# Altium PCB DIOT_PSU_Mezzanine.PcbDoc
Units mm, origin at the board's own origin, x right, y up, seen from the top; angles counter-clockwise.
Board outline 52.4 x 79.6 mm, 2 copper layers (Top Layer, Bottom Layer), stack 1.69 mm thick; 23 components, 16 nets, 70 pads, 10 vias.
Unrouted connection lines stored in the file: 1.
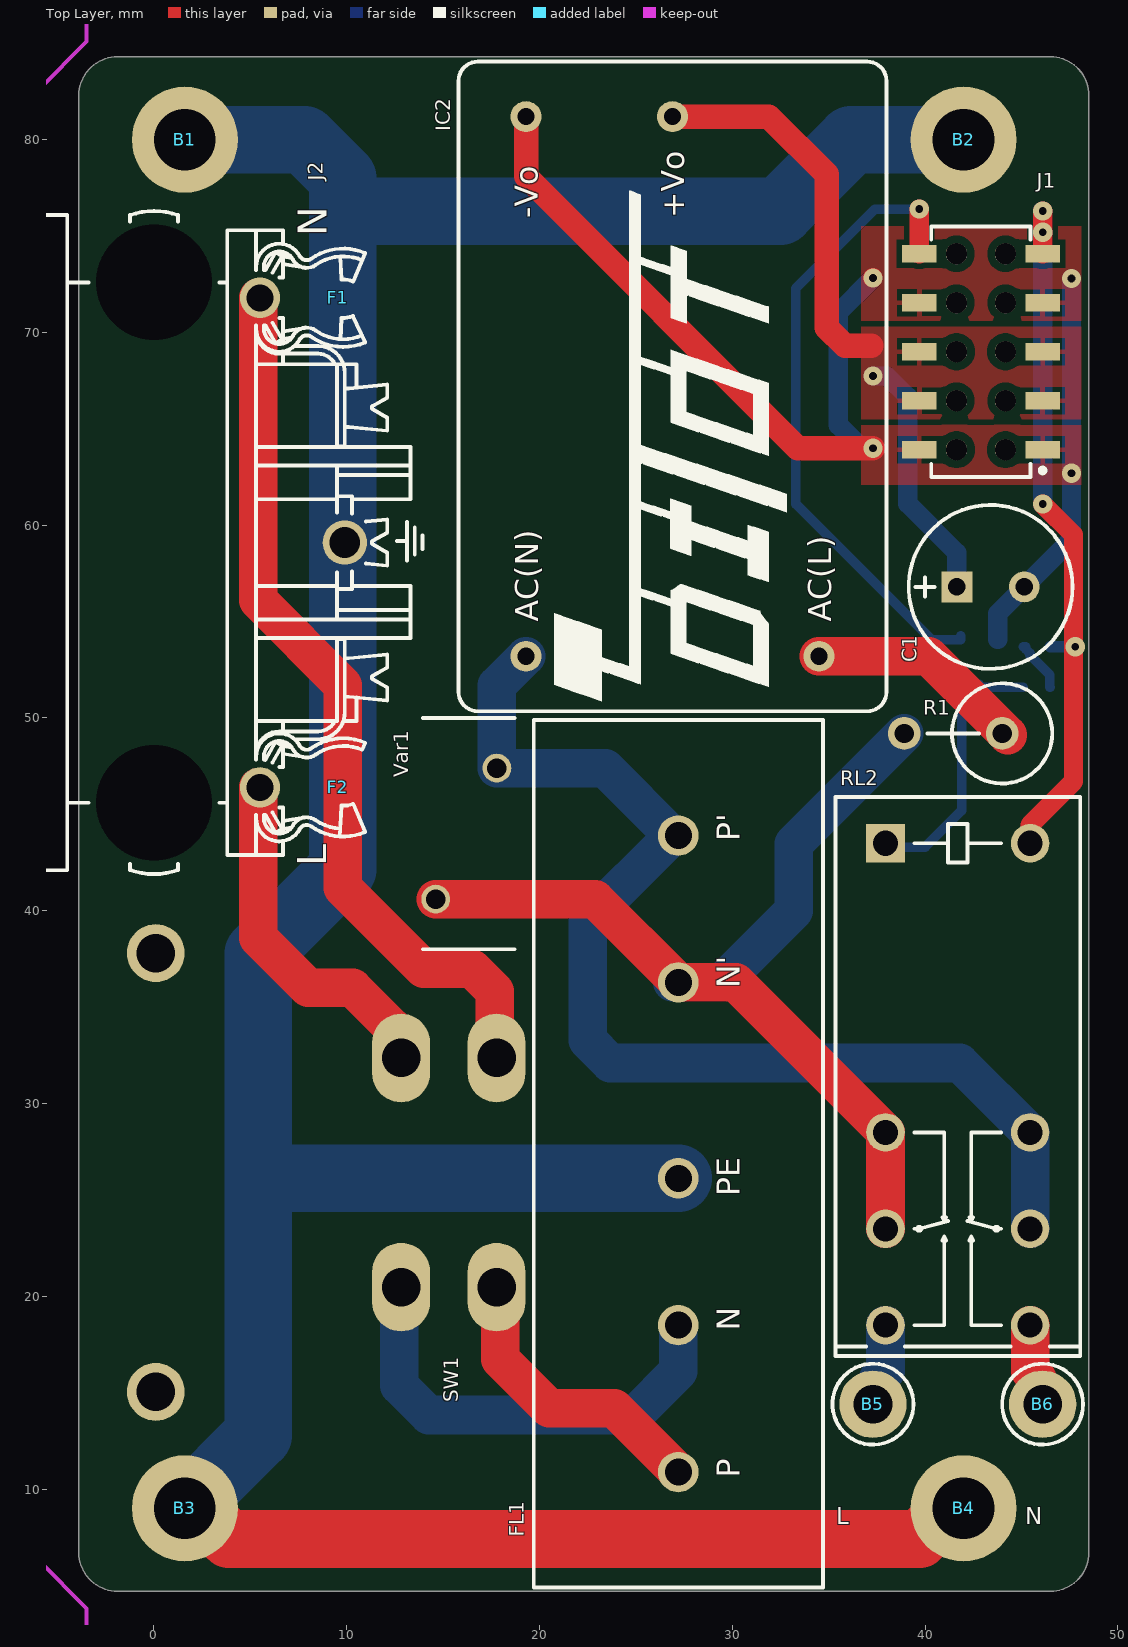
[diagram p0: Top Layer view]
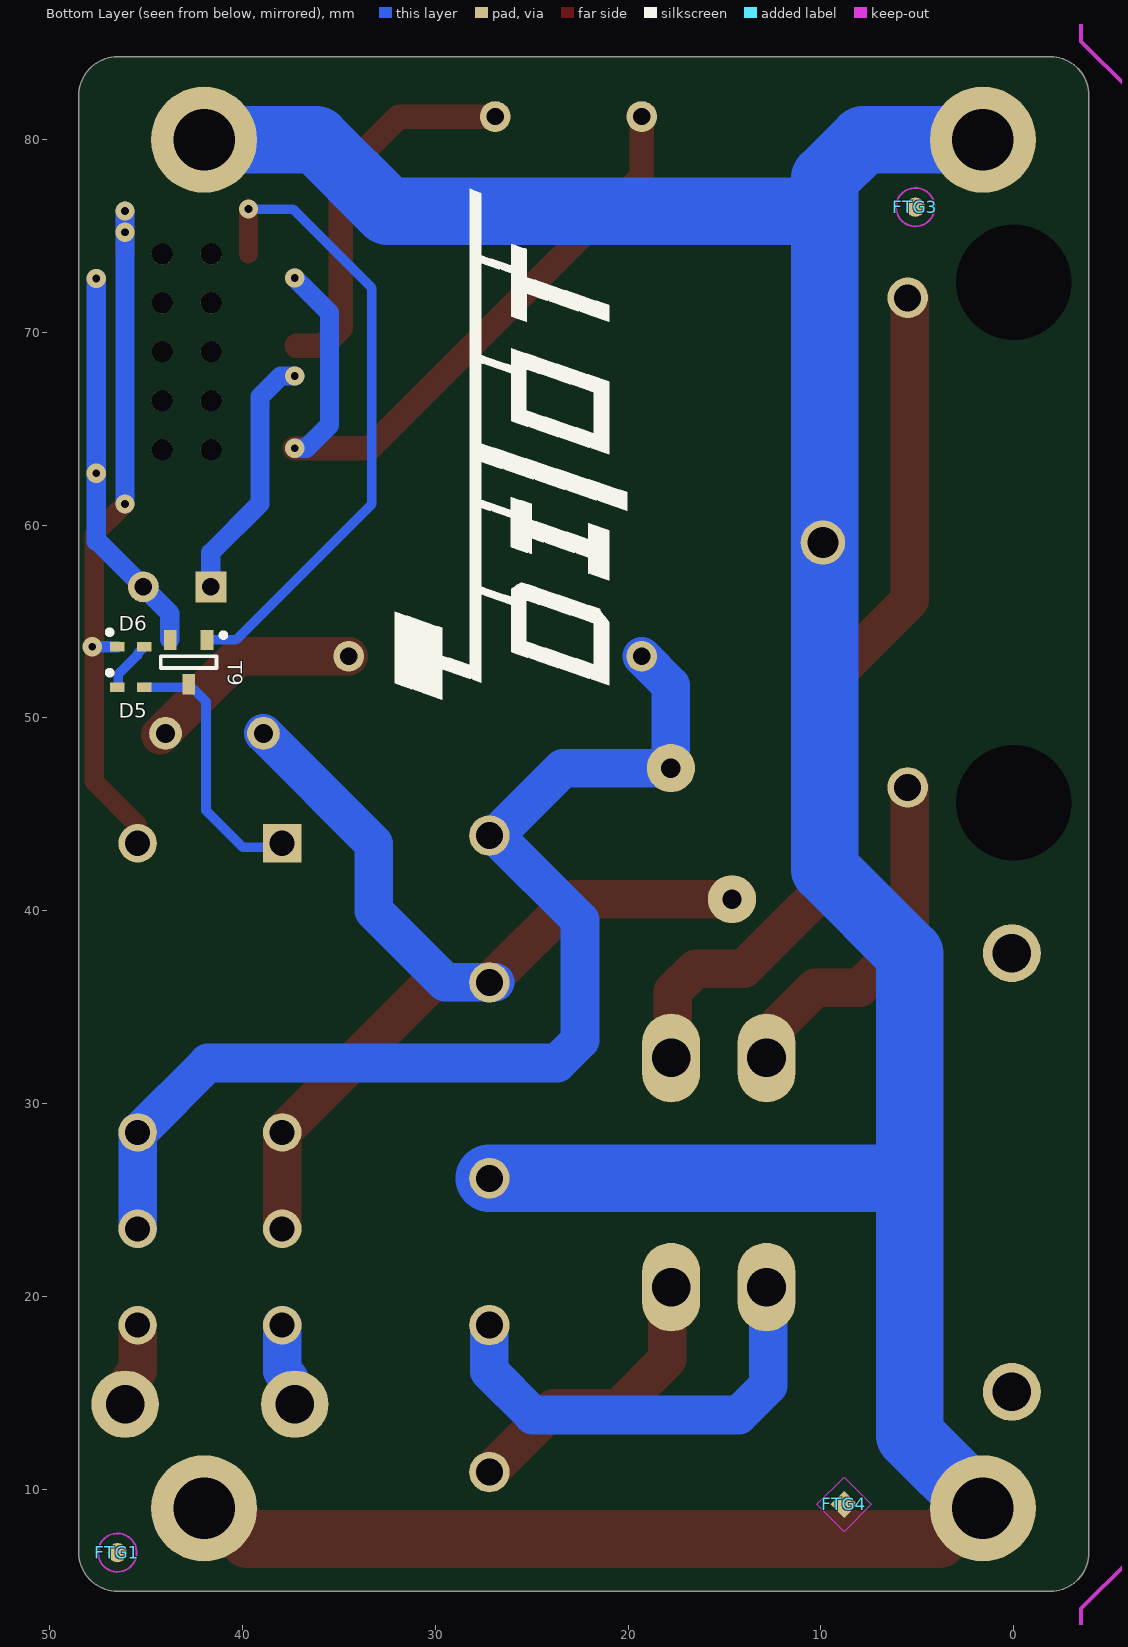
[diagram p1: Bottom Layer view, seen from below]
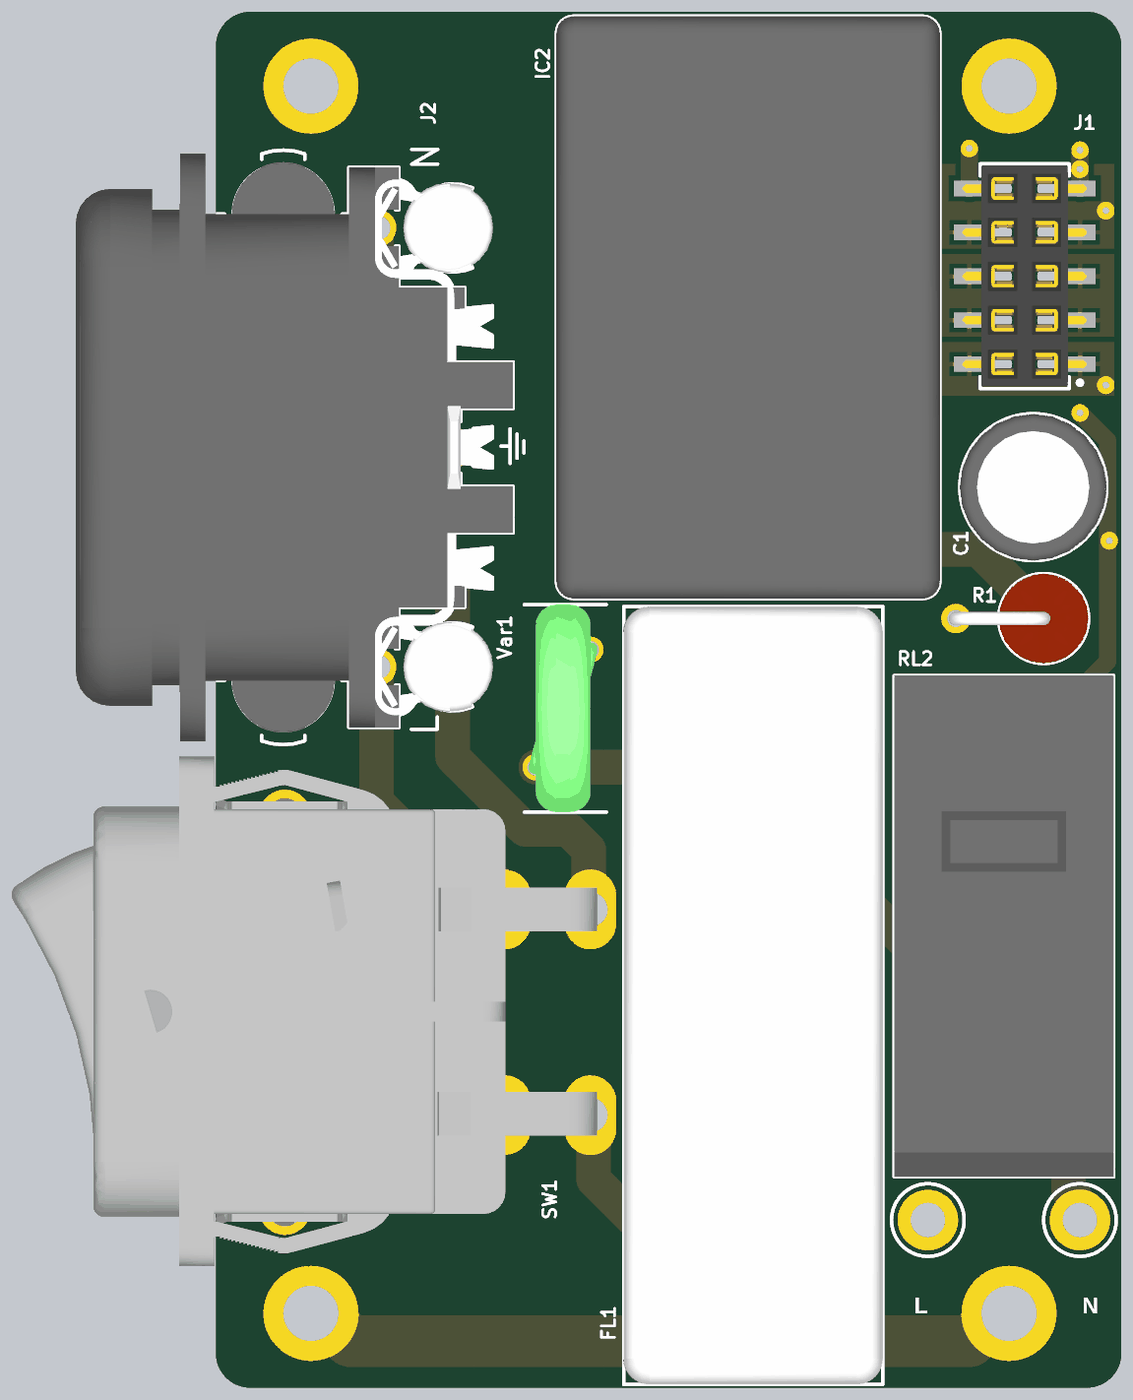
[diagram p2: 3D render of the assembled board from above, using the file's embedded part models]
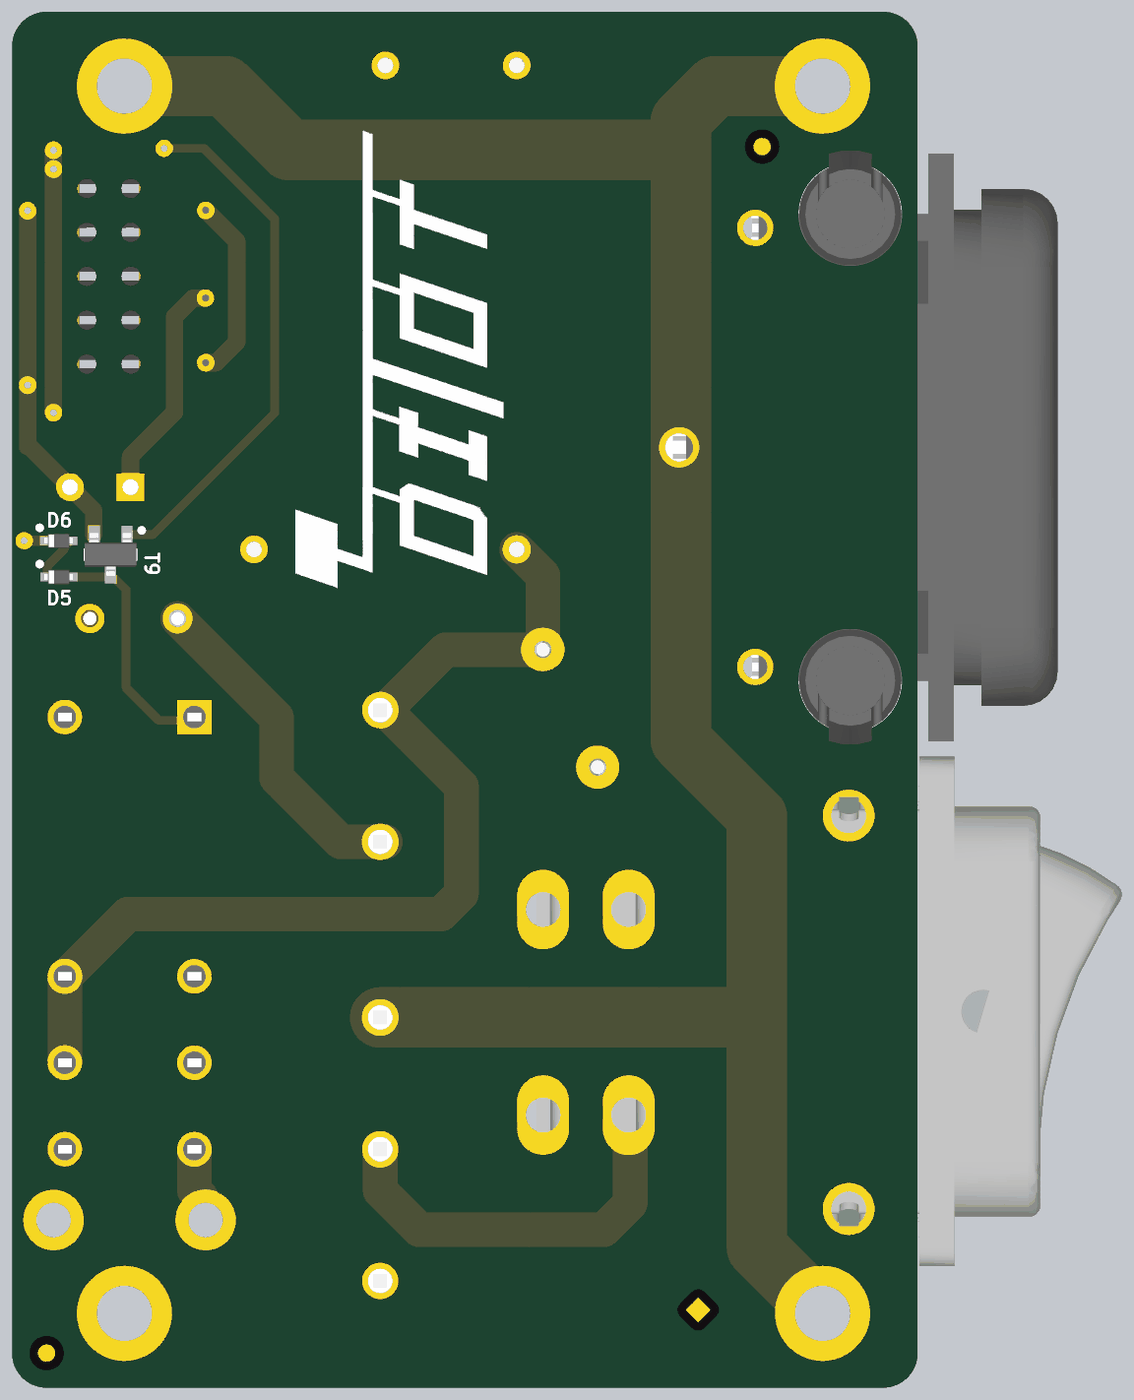
[diagram p3: 3D render of the assembled board from below, using the file's embedded part models]

## Layer stack, top to bottom
Top Solder: solder mask 0.02, Solder Resist, Dk 3.5
Top Layer: signal copper 0.07
Dielectric 2: core 1.55, FR-4, Dk 4.3
Bottom Layer: signal copper 0.07
Bottom Solder: solder mask 0.02, Solder Resist, Dk 3.5

## Board outline
-3.9,6.7 -3.9,82.3 cw(c-1.9,82.3) -1.9,84.3 46.5,84.3 cw(c46.5,82.3) 48.5,82.3 48.495,82.3 48.495,6.7 48.5,6.7 cw(c46.5,6.7) 46.5,4.7 -1.9,4.7 cw(c-1.9,6.7)

## Design rules (kind name [scope] priority, off if disabled: settings)
AcuteAngle [All] p1: minimum=6.00000000000000E+0001 checktracksonly=FALSE
BoardOutlineClearance [All] p1: gap=0.203 ignorepadtopadclearanceinfootprint=FALSE except(0: Arc-SplitContinuation Track-SplitContinuation SMDPad-SplitContinuation THPad-SplitContinuation Via-SplitContinuation Fill-SplitContinuation Poly-SplitContinuation Region-SplitContinuation Text-SplitContinuation; 0.25: Track-OutlineEdge SMDPad-OutlineEdge THPad-OutlineEdge Via-OutlineEdge Fill-OutlineEdge Poly-OutlineEdge Region-OutlineEdge)
Clearance Clearance_NPTH [not IsSMTPin and not PadIsPlated] p1: gap=0.4 ignorepadtopadclearanceinfootprint=FALSE
Clearance Clearance_Mires [OnLayer('Keep-Out Layer') vs HasFootprint('FIDUCIAL_TOP_S200-400') or HasFootprint('FIDUCIAL_TOP_C100-200') or HasFootprint('FIDUCIAL_TOP_S100-200') or  HasFootprint('FIDUCIAL_TOP_C40-120')] p2: gap=0 ignorepadtopadclearanceinfootprint=FALSE except(4.9: Arc-SMDPad Track-SMDPad)
Clearance Clearance_outer [OnOutside] p3: gap=0.305 ignorepadtopadclearanceinfootprint=FALSE
Clearance Clearance_inner [OnMid] p4: gap=0.254 ignorepadtopadclearanceinfootprint=FALSE
ComponentClearance ComponentClearance_pressfit [HasCompParameterValue('PressFit','Yes') vs InComponent('No Component')] p1: gap=1 collisioncheckmode=3 verticalgap=0.254 showdistances=FALSE
ComponentClearance ComponentClearance_NM [InComponentClass('NotMounted')] p2: gap=0 collisioncheckmode=3 verticalgap=0 showdistances=FALSE
ComponentClearance Clearance_screws [InComponent('SCREW1') or InComponent('SCREW2') or InComponent('SCREW3') or InComponent('SCREW4') or InComponent('B1') or InComponent('B2') or InComponent('B3') or InComponent('B4') vs InComponent('B1') or InComponent('B2') or InComponent('B3') or InComponent('B4') or InComponent('WASHER1') or InComponent('WASHER2') or InComponent('WASHER3') or InComponent('WASHER4')] p3: gap=-5 collisioncheckmode=3 verticalgap=-5 showdistances=FALSE checkcomponentboundary=TRUE
ComponentClearance ComponentClearance_Top [InComponent('J2') vs InComponent('F1') or InComponent('F2')] p4: gap=-5 collisioncheckmode=3 verticalgap=-5 showdistances=FALSE
ComponentClearance [All] p5: gap=0.254 collisioncheckmode=3 verticalgap=0.254 showdistances=FALSE
FabricationTestPointUsage TestPointUsage [All] p1: valid=0 allowmultiple=FALSE
FabricationTestpoint Testpoint [All] p1: side=3 testpointundercomponent=TRUE minsize=1.016 maxsize=2.54 preferedsize=1.524 minholesize=0 maxholesize=1.016 preferedholesize=0.813 testpointgrid=0.025 allowsidetop=TRUE allowsidebottom=TRUE usegrid=TRUE gridtolerance=0
Height Height_Bot [OnBottom] p1: minheight=0 maxheight=2 prefheight=1
Height Height_Top [OnTop] p2: minheight=0 maxheight=35 prefheight=10
HoleSize [All] p1: absolutevalues=TRUE maxlimit=6 minlimit=0.4 maxpercent=80.000 minpercent=20.000
HoleToHoleClearance [All] p1: gap=0.2 allowstackedmicrovias=TRUE
MinimumAnnularRing MinimumAnnularRing_Via [IsVia] p1: minimumring=0.25
MinimumSolderMaskSliver [IsThruPin vs IsThruPin] p1: minsoldermaskwidth=0
PermittedLayers [All] p1: toplayerpermitted=TRUE bottomlayerpermitted=TRUE
PlaneConnect PlaneConnect_Vias [(IsVia or InPadClass('Direct')   )] p1: planeconnectstyle=Direct reliefexpansion=0.508 reliefentries=4 reliefconductorwidth=0.254 reliefairgap=0.254
PlaneConnect "PlaneConnect_0 > 0.5" [AsMM(HoleDiameter)<0.5] p2: planeconnectstyle=Relief reliefexpansion=0.3 reliefentries=4 reliefconductorwidth=0.2 reliefairgap=0.2
PlaneConnect "PlaneConnect_0.5 > 1" [(AsMM(HoleDiameter)>=0.5) and (AsMM(HoleDiameter)<1)] p3: planeconnectstyle=Relief reliefexpansion=0.3 reliefentries=4 reliefconductorwidth=0.25 reliefairgap=0.2
PlaneConnect "PlaneConnect_1 > 1.5" [(AsMM(HoleDiameter)>=1) and (AsMM(HoleDiameter)<1.5)] p4: planeconnectstyle=Relief reliefexpansion=0.3 reliefentries=4 reliefconductorwidth=0.3 reliefairgap=0.2
PlaneConnect "PlaneConnect_1.5 > 2" [(AsMM(HoleDiameter)>=1.5) and (AsMM(HoleDiameter)<4)] p5: planeconnectstyle=Direct reliefexpansion=0.3 reliefentries=4 reliefconductorwidth=0.4 reliefairgap=0.2
PlaneConnect [All] p6: planeconnectstyle=Relief reliefexpansion=0.3 reliefentries=4 reliefconductorwidth=0.5 reliefairgap=0.2
PolygonConnect PolygonConnect_PE [InNet('PE') vs InComponent('J5')] p1: connectstyle=Direct reliefconductorwidth=0.254 reliefentries=4 polygonreliefangle="90 Angle" airgapwidth=0.254
PolygonConnect [All] p2: thpad.connectstyle=Relief thpad.reliefconductorwidth=0.85 thpad.reliefentries=4 thpad.polygonreliefangle="45 Angle" thpad.airgapwidth=0.254 smdpad.connectstyle=Relief smdpad.reliefconductorwidth=0.254 smdpad.reliefentries=4 smdpad.polygonreliefangle="90 Angle" smdpad.airgapwidth=0.254 via.connectstyle=Direct via.reliefconductorwidth=0.254 via.reliefentries=4 via.polygonreliefangle="90 Angle" via.airgapwidth=0.254
RoutingLayers RoutingLayers_MGT [InNetClass('FMC_MGT') or InNetClass('SLOT1_MGT') or InNetClass('SLOT2_MGT')  or InNetClass('SLOT3_MGT')  or InNetClass('SLOT4_MGT') or InNetClass('SLOT5_MGT')  or InNetClass('SLOT6_MGT')    or InNetClass('SLOT7_MGT')   or InNetClass('SLOT8_MGT')] p1: top layer_v5=TRUE bottom layer_v5=TRUE
RoutingVias [All] p1: holewidth=0.5 width=1 viastyle="Through Hole" minholewidth=0.4 minwidth=1 maxholewidth=1 maxwidth=2
SilkToSilkClearance [All] p1: silktosilkclearance=0.01
SilkToSolderMaskClearance [IsPad and not InPadClass ('Overlay_exceptions')] p1: minsilkscreentomaskgap=0.075 clearancetoexposedcopper=TRUE
SolderMaskExpansion [All] p1: expansion=0.015 istentingtop=FALSE
SupplyNets "Schematic Supply Nets_1" [InNet('P5V0')] p1: voltage=0.000
SupplyNets "Schematic Supply Nets" [InNet('P5V0_REL')] p2: voltage=0.000
SupplyNets "Schematic Supply Nets_5" [InNet('PE')] p3: voltage=0.000
SupplyNets "Schematic Supply Nets_2" [InNet('GND')] p4: voltage=0.000
UnRoutedNet [Not InNet('CHASSIS')] p1:
ViasUnderSMD [All] p1: allowed=FALSE
Width [All] p1: maxlimit=5 minlimit=0.2 preferedwidth=0.5
18 further rules are at their usual default settings.

## Components (designator, comment, footprint, x,y, rotation, side; value= is the part's Value field where it differs from the comment)
B1 "Plated Hole" MTG320_550 1.6,80 r0 top
B2 "Plated Hole" MTG320_550 42,80 r0 top
B3 "Plated Hole" MTG320_550 1.6,9 r0 top
B4 "Plated Hole" MTG320_550 42,9 r0 top
B5 "Plated Hole" c350h200 37.3,14.4 r0 top
B6 "Plated Hole" c350h200 46.1,14.4 r0 top
C1 "100uF" CAPPR350-850X600 43.4,56.8 r0 top
D5 "PESD3V3S1UB" SODFL1608X65N 45.8,51.6 r180 bottom
D6 "PESD3V3S1UB" SODFL1608X65N 45.8,53.7 r180 bottom
F1 "0001.1012" 0001.1012 9.545,71.8 r0 top
F2 "0001.1012" 0001.1012 9.545,46.4 r0 top
FL1 "1A/250VAC" "FIL_SCHAFFNER_FN 406" 27.2,27.39 r90 top
FTG1 "Use only in PCB" FIDUCIAL_TOP_C100-200 46.5,6.7 r180 bottom
FTG3 "Use only in PCB" FIDUCIAL_TOP_C100-200 5.1,76.5 r0 bottom
FTG4 "Use only in PCB" FIDUCIAL_TOP_S100-200 8.8,9.2 r0 bottom
IC2 "IRM-02-5" PWS_MEANWELL_IRM-02 26.9,67.2 r90 top
J1 "610010243021" 610010243021 42.9,69 r90 top
J2 "IEC" SCHURTER_GSF1.2202.31 0,59.1 r90 top
R1 "10" RESADV508-1670X520 44,49.2 r180 top
RL2 "REL_OMRON_G2RL-24" REL_OMRON_G2RL-24 41.7,31.4 r270 top value=5VDC
SW1 "DF62J12S2AHQA" DF62J12S2AHQA 0.093,15.04 r0 top
T9 "BSS138LT1G" SOT95P240X110-3N 42.8,52.9 r270 bottom
Var1 "V10N361" "VARISTOR THT" 16.2,44 r270 top

## Footprints (in the part's own frame and the unit in brackets; to place one, negate y for a bottom-side part, rotate by r counter-clockwise, add the part's x,y. Pads: shape width x height; smd on the part's side, far side on the other; paste and mask are expansions set on the pad)
0001.1012 [mm]
  body extent -2.6,-2.59 2.6,2.59, height 22
610010243021 [mm] "Socket Header, Pitch 2.54 mm, SMT, Vertical, dual row, 10p"
  rect 0.9x1.8 smd: 1(-5.08,-3.2) 2(-5.08,3.2) 3(-2.54,-3.2) 4(-2.54,3.2) 5(0,-3.2) 6(0,3.2) 7(2.54,-3.2) 8(2.54,3.2) 9(5.08,-3.2) 10(5.08,3.2)
  round 1.1 hole 1.1 unplated: MH1(-5.08,-1.27) MH2(-5.08,1.27) MH3(-2.54,-1.27) MH4(-2.54,1.27) MH5(0,-1.27) MH6(0,1.27) MH7(2.54,-1.27) MH8(2.54,1.27) MH9(5.08,-1.27) MH10(5.08,1.27)
  silkscreen extent -6.5,-3.33 6.5,2.58, body extent -6.35,-3.6 6.35,3.6, height 3.7
c350h200 [mm] "Plated Through Hole: Hole Dia.=2mm Pad Dia.=3.5mm"
  round 3.5 hole 2: 1(0,0)
  silkscreen extent -2.1,-2.1 2.1,2.1
CAPPR350-850X600 [mm] "Capacitor, Radial, Pin spacing 3.5mm - Body Diameter 8.5mm X Body Height 6.0mm"
  rect 1.6x1.6 hole 0.9: 1(-1.75,0)
  round 1.6 hole 0.9: 2(1.75,0)
  silkscreen extent -4.25,-4.25 4.25,4.25, body extent -4.26,-4.26 4.24,4.24, height 6
DF62J12S2AHQA [mm]
  oval 3x4.6 hole 2: 1(12.73,17.325) 1A(12.73,5.435) 2(17.68,17.325) 2A(17.68,5.435)
  round 3 hole 2: MH1(0,22.76) MH2(0,0)
  body extent -15.81,-3.32 18.07,26.16, height 12.61
FIDUCIAL_TOP_C100-200 [mm] "Round Fiducial Target, Top Layer, 1.0mm, Top Solder 2.0mm, Keepout =2.0mm"
  round 1 smd paste-0.51 mask+0.5: FTG2(0,0)
  Top Layer keep-out circle w0.1: c0,0 r1
FIDUCIAL_TOP_S100-200 [mm] "Square Fiducial Target, Top Layer, 1.0mm, Top Solder 2.0mm, Keepout =2.0mm"
  rect 1x1 smd rot 45 paste-0.51 mask+0.5: 1(0,0)
  Top Layer keep-out region: 1.414,0 0,-1.414 -1.414,0 0,1.414
"FIL_SCHAFFNER_FN 406" [mm] "0.5 to 8.4A 250VAC Single Phase Ultra Compact EMC Filter (Body 45 x 15 x 28mm)"
  round 2.1 hole 1.4: N(-8.89,0) N'(8.89,0) P(-16.51,0) P'(16.51,0) PE(-1.27,0)
  silkscreen extent -22.5,-7.5 22.5,7.5, body extent -22.5,-7.55 22.5,7.54, height 29.5
MTG320_550 [mm] "Plated Through Hole: Hole Dia.=3.2mm Pad Dia.=5.5mm"
  round 5.5 hole 3.2: 1(0,0)
PWS_MEANWELL_IRM-02 [mm] "IRM-02 Series, Body 33.7x22.2mm, Power Supply"
  round 1.6 hole 0.9: 1(-14,7.6) 2(-14,-7.6) 3(14,7.6) 4(14,0)
  silkscreen extent -16.85,-11.1 16.85,11.1, body extent -16.85,-11.1 16.85,11.1, height 15
REL_OMRON_G2RL-24 [mm] "8 Leads, Row Spacing 7.5 mm; Body 29mm x 12.7mm, OMRON_G2RL Series"
  rect 2x2 hole 1.3: 1(-12.1,-3.75)
  round 2 hole 1.3: 2(2.9,-3.75) 3(7.9,-3.75) 4(12.9,-3.75) 5(12.9,3.75) 6(7.9,3.75) 7(2.9,3.75) 8(-12.1,3.75)
  silkscreen extent -14.5,-6.35 14.5,6.35, body extent -14.5,-6.35 14.5,6.35, height 15.7
RESADV508-1670X520 [mm] "Resistor, Axial, Vertical Mount, Lead spacing 5.08 mm - Body Lengh 16.7mm X Body Diameter 5.2mm"
  round 1.7 hole 1: 1(0,0) 2(5.08,0)
  silkscreen extent -2.6,-2.6 3.88,2.6, body extent -2.6,-2.6 5.47,2.6, height 23.6
SCHURTER_GSF1.2202.31 [mm] "IEC Appliance Inlet C14 with 2 Pole Fuseholder"
  round 2.1 hole 1.4: 1(-12.7,-5.5) 3(12.7,-5.5)
  round 2.3 hole 1.6: 2(0,-9.9)
  round 1 hole 6 unplated mask+2.5: 4(-13.5,0) 5(13.5,0)
  silkscreen extent -17.2,-13.93 17.2,12, body extent -17.18,-13.3 17.18,12, height 24.45
SODFL1608X65N [mm] "Ultra Small Outline Diode Flat Lead (SOD-523), Body; 1.2mm L X 0.8mm W X 0.65mm H, IPC Medium Density"
  rect 0.75x0.5 smd: 1(-0.7,0) 2(0.7,0)
  silkscreen extent -1.23,0.63 -0.98,0.87, body extent -0.82,-0.42 0.83,0.43, height 0.65
SOT95P240X110-3N [mm] "SOT23 3-Leads, Pitch 0.95mm, Body 1.3x2.9mm, IPC Medium Density"
  rect 1.05x0.65 smd: 1(-1.15,0.95) 2(-1.15,-0.95) 3(1.15,0)
  silkscreen extent -1.52,-1.45 0.3,1.92, body extent -1.25,-1.5 1.25,1.5, height 1.1
"VARISTOR THT" [mm] "fi10mm"
  round 1.5 / inner round 1.5 / far side round 2.5 hole 1: 1(-3.399,1.585) 2(3.399,-1.585)
  silkscreen extent -6,-2.25 6,2.5, body extent -6,-1.98 6,1.99, height 14.8

## Part data
B1 B2 B3 B4: library part PLATED_HOLE3.2_PAD5.5, "Single Terminal Socket", Author="CERN DEM JMW", Component Type="Standard (No BOM)", ComponentHeight=0mm, CreateDate=01.10.2012, Family="Plated Hole", HelpURL=Undefined, LatestRevisionDate=01.10.2012, Mounted=No, PackageDescription="Plated Through Hole: Hole Dia.=3.2mm Pad Dia.=5.5mm", Part Description="Plated Through Hole: Hole Dia.=3.2mm Pad Dia.=5.5mm", Part Number=PLATED_HOLE3.2_PAD5.5, Pin Count=1, Sense=No, SMD=No, Socket=No, Status=None
B5 B6: library part PLATED_HOLE2.0_PAD3.5, "Single Terminal Socket", Author="CERN DEM JMW", Component Type="Standard (No BOM)", ComponentHeight=0mm, CreateDate=05.11.2009, Family="Plated Hole", HelpURL=Undefined, LatestRevisionDate=05.11.2009, Mounted=No, PackageDescription="Plated Through Hole: Hole Dia.=2.0mm Pad Dia.=3.5mm", Part Description="Plated Through Hole: Hole Dia.=2.0mm Pad Dia.=3.5mm", Part Number=PLATED_HOLE2.0_PAD3.5, Pin Count=1, Sense=No, SMD=No, Socket=No, Status=None
C1: library part CAER_100UF_10V_20%_350-850X600_LESR0R032, "Polarised capacitor", Case="LS3.5 D8.5 x H6", Manufacturer="SANYO OS-CON", Manufacturer Part Number=10SP100M, Tolerance=±20%, Voltage=10V, Author="CERN DEM JLC", Component Type=Standard, ComponentHeight=6mm, CreateDate=29.01.2008, HelpURL=\\cern.ch\dfs\Applications\Altium\Datasheets\CAER-LESR_SANYO_SP.pdf, LatestRevisionDate=16.03.2009, Mounted=Yes, Part Description="Low ESR 0R032 Aluminum Solid Capacitor with Organic Semiconductive Electrolyte", Part Number=CAER_100UF_10V_20%_350-850X600_LESR0R032, Pin Count=2, Sense=No, SMD=No, Socket=No, Status=Obsolete
D5 D6: "ESD protection diode", Case=SOD523, Manufacturer="NXP SEMICONDUCTORS", Power=330W, Voltage=3V3, Author="CERN DEM JLC", Bonding=No, Component Type=Standard, ComponentHeight=0.65mm, CreateDate=29.11.2012, Device=PESD3V3S1UB, HelpURL=\\cern.ch\dfs\Applications\Altium\Datasheets\PESD3V3S1UB.pdf, LatestRevisionDate=29.11.2012, Manufacturer Part Number=PESD3V3S1UB, Mounted=Yes, PackageDescription="Ultra Small Outline Diode Flat Lead (SOD-523), Body; 1.2mm L X 0.8mm W X 0.65mm H, IPC Medium Density", Part Description="ESD protection diode (23kV)", Part Number=PESD3V3S1UB, Pin Count=2, PressFit=No, Sense=No, SMD=Yes, Socket=No
F1 F2: library part CMP-005-00401-1, "Electric Fuse, Very Fast Blow, 6.3A, 250VAC, 1500A (IR), Inline/holder, 5x20mm", Current Rating=6.3A, Max Operating Temperature=125°C, Min Operating Temperature=-55°C, Mounting Technology=Holder, RoHS Compliant=Yes
FL1: library part "FIL_SCHAFFNER_FN 406-1-02", "0.6 to 8.4A 230VAC Single Phase Ultra Compact EMC Filter", Case="L45 W15 H28", Manufacturer=SCHAFFNER, Manufacturer Part Number=FN406-3-02, Part Number=FIL_SCHAFFNER_FN406-3-02, Author="CERN DEM JLC", Component Type=Standard, ComponentHeight=28mm, CreateDate=24.05.2017, HelpURL="\\cern.ch\dfs\Applications\Altium\Datasheets\FIL_SCHAFFNER_FN 406-1-02.pdf", LatestRevisionDate=24.05.2017, Mounted=Yes, Part Description="Single Phase Ultra Compact EMC Filter", Pin Count=5, Sense=No, SMD=No, Socket=No
FTG1 FTG3: library part FIDUCIAL_TARGET_C100-200, "Fiducial Target", Author="CERN DEM JLC", Component Type="Standard (No BOM)", ComponentHeight=0mm, CreateDate=09.02.2010, Family=Fiducial, HelpURL=Undefined, LatestRevisionDate=04.04.2012, Mounted=No, PackageDescription="Round Fiducial Target, Top Layer, 1.0mm, Top Solder 2.0mm, Keepout =2.0mm", Part Description="Round Fiducial Target, Top Layer, 1.0mm, Top Solder 2.0mm, Keepout =2.0mm", Part Number=FIDUCIAL_TARGET_C100-200, Pin Count=1, Sense=No, SMD=Yes, Socket=No, Status=None
FTG4: library part FIDUCIAL_TARGET_S100-200, "Fiducial Target", Author="CERN DEM JLC", Component Type="Standard (No BOM)", ComponentHeight=0mm, CreateDate=09.02.2010, Family=Fiducial, HelpURL=Undefined, LatestRevisionDate=04.04.2012, Mounted=No, PackageDescription="Square Fiducial Target, Top Layer, 1.0mm, Top Solder 2.0mm, Keepout =2.0mm", Part Description="Square Fiducial Target, Top Layer, 1.0mm, Top Solder 2.0mm, Keepout =2.0mm", Part Number=FIDUCIAL_TARGET_S100-200, Pin Count=1, Sense=No, SMD=Yes, Socket=No, Status=None
IC2: library part AC_DC_IRM-02-5, "Power Supply", Manufacturer="MEAN WELL", Author=GK, Bonding=No, Component Type=Standard, ComponentHeight=15mm, CreateDate=14.02.2018, Device=IRM-02-5, HelpURL=\\cern.ch\dfs\Applications\Altium\Datasheets\IRM-02-24.pdf, LatestRevisionDate=14.02.2018, Manufacturer Part Number=IRM-02-5, Mounted=Yes, PackageDescription="IRM-02 Series, Body 33.7x22.2mm, Power Supply", Part Description="85-305VAC to 5VDC (400mA) 2W Power Supply", Part Number=IRM-02-5, Pin Count=4, PressFit=No, Sense=No, SMD=No, Socket=No, Status=None
J1: "WR-PHD Socket Header, SMT, Vertical, pitch 2.54mm, 2 Row, 10P", Contact Resistance=20mOhm, Manufacturer="Wurth Elektronik", Operating Temperature Max=125°C, Operating Temperature Min=-40°C, Rated Current=3A, Withstanding Voltage=500V, Working Voltage=250V, Category="Board-to-Board Connectors", ComponentLink1Description="Website Link", ComponentLink1URL=https://www.we-online.com/redexpert/article/610010243021?ad, ComponentLink2Description="Datasheet Link", ComponentLink2URL=https://www.we-online.com/redexpert/spec/610010243021?ad, Gender="Socket Header", Manufacturer Part Number=610010243021, Match Code=WR-PHD, Mount="Surface Mount", Number of Pins=10, Number of Rows=2, Orientation=Vertical, Packaging=Tube, Pitch=2.54mm
J2: library part SCHURTER_GSF1.2202.31, "Connector 3 Male 2P+ 2 Fuse Holder", Manufacturer=SCHURTER, Manufacturer Part Number=GSF1.2201.31, Part Number=SCHURTER_GSF1.2201.31, Author="CERN DEM JMW", Component Type=Standard, ComponentHeight=24.45mm, CreateDate=20.09.2012, Family=IEC, HelpURL=\\cern.ch\dfs\Applications\Altium\Datasheets\SCHURTER_GSF1.2202.31.pdf, LatestRevisionDate=20.09.2012, Mounted=Yes, Part Description="10A 250Vac Sandwich Panel Mount (1.5mm) Inlet IEC Connector With 2 Fuseholder 5x20mm And Snap-in PCB Mount", Pin Count=3, PressFit=No, Sense=No, SMD=No, Socket=No, Status=None
R1: library part RMF_10R_5%_3W_250PPM_508-1670X520_v, "Resistor - 5%", Case="LS5.08 L16.7 x D5.2", Manufacturer=GENERIC, Manufacturer1 ComponentHeight=23.6mm, Manufacturer1 Example="VISHAY BCCOMPONENT", Manufacturer1 Part Number=PR03000201009JAC00, Manufacturer Part Number=RMF_10R_5%_3W_250PPM_508-1670X520, Power=3W, Tolerance=±5%, Author="CERN DEM JLC", Component Type=Standard, ComponentHeight=23.6mm, CreateDate=04.07.2017, HelpURL=\\cern.ch\dfs\Applications\Altium\Datasheets\RMF_VISHAY_PR03.pdf, LatestRevisionDate=04.07.2017, Mounted=Yes, Part Description="Leaded Power Metal Film Resistor (Vertical Mount) PR03 Series", Part Number=RMF_10R_5%_3W_250PPM_508-1670X520_v, Pin Count=2, PressFit=No, Sense=No, SMD=No, Socket=No, Status=Preferred, TC=±250ppm/°C
RL2: library part REL_OMRON_G2RL-24-DC5, "DPDT Power Relay, G2RL Series", Manufacturer="OMRON ELECTRONIC", Manufacturer Part Number=G2RL-24-DC5, Author="CERN DEM BC", Component Type=Standard, ComponentHeight=15.7mm, CreateDate=11.09.2023, HelpURL=\\cern.ch\dfs\Applications\Altium\Datasheets\REL_OMRON_G2RL-24.pdf, LatestRevisionDate=11.09.2023, Mounted=Yes, PackageDescription="8 Leads, Row Spacing 7.5mm; Body 29mm x 12.7mm, OMRON_G2RL Series", Part Description="8A@250VAC, DPDT Power Relay, G2RL Series", Part Number=REL_OMRON_G2RL-24-DC5, Pin Count=8, PressFit=No, Sense=No, Sense Comment="Sensitive=No (Component Sealed)", SMD=No, Socket=No, Status=None
SW1: "Rocker Switch DPST 16A (AC), 6A (DC) 125 V Panel Mount, Snap-In, Right Angle", Manufacturer=C&K, Tolerance=±1%, Author=LPA, Component Type=Standard, ComponentHeight=12mm, CreateDate=9.03.2025, HelpURL=https://www.ckswitches.com/media/1443/df.pdf, LatestRevisionDate=9.03.2025, Manufacturer Part Number=DF62J12S2AHQA, Mounted=Yes, Part Description="Rocker Switch DPST 16A (AC), 6A (DC) 125 V Panel Mount, Snap-In, Right Angle", Part Number=DF62J12S2AHQA, Pin Count=6, PressFit=No, Sense=No, SMD=No, Socket=No, Status=None
T9: "N-CHANNEL MOSFET WITH DIODE", Case=SOT23-3, Manufacturer="ON SEMICONDUCTOR", Manufacturer Part Number=BSS138L, Author="CERN DEM JLC", Bonding=No, Component Type=Standard, ComponentHeight=1.11mm, CreateDate=23.03.2009, Device=BSS138LT1G, HelpURL=\\cern.ch\dfs\Applications\Altium\Datasheets\BSS138LT1G.pdf, LatestRevisionDate=25.05.2022, Mounted=Yes, PackageDescription="SOT23, 0.95mm Pitch; 3 Pin, 1.40mm W X 3.00mm L X 1.10mm H body, IPC Medium Density", Part Description="50V, 200mA N-Channel Enhancement Mode Field-Effect Transistor", Part Number=BSS138LT1G, Pin Count=3, PressFit=No, Sense=No, SMD=Yes, Socket=No
Var1: "Warystor fi10mm 360V", Manufacture=LS-TECH, Value1=360V, Value2=3.6kA, Assembly=THT, ComponentLink1Description=Datasheet, ComponentLink1URL=https://www.maritex.com.pl/elementy_pasywne/warystory/warystory_tht/warystory_tht/v10n361.html, ComponentSymbol=V10N361, ComponentType=Varistor, DafaultFootprint="THT Varistor fi10mm", Parameter1=Umax, Parameter2=Imax, Replacement1=ERZE10A361, Shop1=Maritex, Shop1ID=V10N361

## Via types
v1: diameter 1, hole 0.4, Top Layer to Bottom Layer, 10 vias

## Nets (pads, with @x,y where several pads share a name; then routed paths per layer and width w, separated by ;. In a path a pad name is that pad's centre, name@x,y a point inside that pad or via, vN(x,y) a via of type N, cw(c..) or ccw(c..) an arc to the next point about the centre after c; other vN are vias at no path point)
GND: C1.2 IC2.3 J1.1 J1.2 J1.7 J1.8 T9.2 | length 57.9
  Top Layer w1: v1@37.28,72.82 v1@37.3,72.84
  Top Layer w1.27: IC2.3 19.3,78.1 33.4,64 v1(37.3,64)
  Bottom Layer w1: 35.5,65.2 35.5,71.02 v1(37.3,72.82) ; T9.2@43.775,54.075 43.775,55.425 47.5,59.15 ; 47.6,59.15 v1(47.6,62.7) v1(47.6,72.8)
  Bottom Layer w1.016: 35.5,65.2 36.7,64 v1(37.3,64)
L: B5.1 RL2.4 | length 4.4
  Bottom Layer w2: B5.1 37.587,14.687 37.587,15.748 37.95,16.111 RL2.4
MAINS_L: FL1.N' R1.2 RL2.2 RL2.3 Var1.2 | length 52.8
  Top Layer w2: Var1.2 22.879,40.601 FL1.N' 30.17,36.28 RL2.2 RL2.3
  Bottom Layer w2: FL1.N'@26.9,36.28 29.48,36.28 33.2,40 33.2,43.48 R1.2
MAINS_N: FL1.P' IC2.1 RL2.6 RL2.7 Var1.1 | length 59.3
  Bottom Layer w2: IC2.1 17.785,51.685 Var1.1 23.401,47.399 26.9,43.9 22.5,39.5 22.5,33.272 23.672,32.1 41.8,32.1 45.4,28.5 RL2.7 ; RL2.6 RL2.7@45.45,28.45
N: B6.1 RL2.5 | length 4.5
  Top Layer w2: RL2.5 45.45,16.111 45.813,15.748 45.813,14.587 B6.1@46.091,14.309
NetD5_1: D5.1 D6.2 | length 2.8
  Bottom Layer w0.5: D6.2 45.225,53.7 45.225,53.575 45.445,53.355 45.445,53.263 46.461,52.247 46.461,51.6 D5.1
NetD5_2: D5.2 RL2.1 T9.3 | length 14.2
  Bottom Layer w0.5: RL2.1@37.95,43.3 40,43.3 41.9,45.2 41.9,50.85 42.525,51.475 42.725,51.475 42.8,51.55 T9.3 42.8,51.675 42.875,51.6 D5.2
NetFL1_N: FL1.N SW1.1A | length 23.5
  Bottom Layer w2: SW1.1A@12.73,20.475 12.73,15.37 14.26,13.84 24.94,13.84 27.2,16.1 FL1.N
NetFL1_P: FL1.P SW1.2A | length 15.5
  Top Layer w2: SW1.2A 17.964,20.284 17.964,16.736 20.5,14.2 23.88,14.2 FL1.P@27.181,10.899
NetIC2_2: IC2.2 R1.1 | length 11.5
  Top Layer w2: IC2.2 40.2,53.2 R1.1@44.282,49.118
NetJ2_1: J2.1 SW1.1 | length 18.5
  Top Layer w2: J2.1@5.4,46.4 5.4,38.6 8,36 10.3,36 12.323,33.977 12.323,33.936 12.823,33.436 SW1.1
NetJ2_3: J2.3 SW1.2 | length 46
  Top Layer w2: J2.3@5.4,71.8 5.4,56.1 9.8,51.7 9.8,41.2 14.005,36.995 16.505,36.995 17.68,35.82 SW1.2@17.68,32.365
P5V0: C1.1 IC2.4 J1.3 J1.4 J1.5 J1.6 | length 33
  Top Layer w1.27: IC2.4 31.9,81.2 34.9,78.2 34.9,70.249 35.849,69.3 37.2,69.3
  Bottom Layer w1: v1(37.3,67.74) 38.019,67.74 39.1,66.659 39.1,61.121 41.65,58.571 C1.1
P5V0_REL: D6.1 J1.9 RL2.8 | length 38.1
  Top Layer w1: RL2.8@45.45,43.3 45.45,44.45 47.7,46.7 47.7,50.1 47.7,59.5 v1(46.1,61.1) ; J1.9 v1(46.1,76.3)
  Bottom Layer w0.6: D6.1 v1(47.8,53.7)
  Bottom Layer w1: v1(46.1,61.1) v1(46.1,75.2) v1(46.1,76.3)
PE: B1.1 B2.1 B3.1 B4.1 FL1.PE J2.2 | length 178.7
  Top Layer w3: B3.1 2.276,9 3.876,7.4 39.724,7.4 41.324,9 B4.1
  Bottom Layer w3.5: B3.1 5.4,12.8 5.4,26.12 ; B1.1 7.8,80 9.8,78 9.8,59.1 9.8,42.16 5.4,37.76 5.4,26.12 ; 9.8,76.3 32.481,76.3 36.181,80 B2.1 ; FL1.PE 5.4,26.12
PS_ON: J1.10 T9.1 | length 33.3
  Top Layer w1: J1.10 v1(39.7,76.4)
  Bottom Layer w0.5: v1(39.7,76.4) 37.4,76.4 33.3,72.3 33.3,61.1 40.35,54.05 T9.1 T9.1@41.85,54.25
pads on no net: FTG1.FTG2 FTG3.FTG2 FTG4.1 J1.MH1 J1.MH2 J1.MH3 J1.MH4 J1.MH5 J1.MH6 J1.MH7 J1.MH8 J1.MH9 J1.MH10 J2.4 J2.5 SW1.MH1 SW1.MH2

## Polygon pours and split planes (outlines as drawn)
GND on Top Layer "NONET_L02_P-001" (solid, pour order 25): 36.7,70.3 36.7,75.5 48.093,75.5 48.093,70.3
P5V0 on Top Layer "NONET_L02_P-001" (solid, pour order 22): 36.7,70.3 36.7,65.5 48.093,65.5 48.093,70.3
GND on Top Layer "NONET_L02_P-001" (solid, pour order 23): 36.7,65.2 36.7,62.1 48.093,62.1 48.093,65.2

## Keep-outs
Keep-Out Layer:
  rectangle: -2.37,91.95 212.6,94.45
  rectangle: -2.4,-5.55 212.6,-3.05
  lines w0.1: -9.57,44.45 -6.506,44.45
  lines w0.2: -3.5,94.45 212.6,94.45 cw(c212.6,93.25) 213.8,93.25 213.8,-4.35 cw(c212.6,-4.35) 212.6,-5.55 -3.5,-5.55 -3.5,3.8 -6,6.3 -6,82.6 -3.5,85.1 -3.5,94.45

## Silkscreen, mask and mechanical layers (free items; w line width, h text height)
Top Overlay:
  region: 4219 vertices and 2 holes, not listed, extent 20.769,50.872 32.827,77.364
  text "L" at 35.4,7.9 h1.5
  text "N" at 45.2,7.9 h1.5
Bottom Overlay:
  region: 4219 vertices and 2 holes, not listed, extent 20.051,50.958 32.109,77.451
Top Paste:
  text ".Layer_Name" at 105.071,-22.101 h1.91
Bottom Paste:
  text ".Layer_Name" at 145.711,-22.101 h1.91
Board outline:
  lines w0.8: -3.57,-4.35 ccw(c-2.37,-4.35) -2.37,-5.55 212.6,-5.55 ccw(c212.6,-4.35) 213.8,-4.35 213.8,93.25 ccw(c212.6,93.25) 212.6,94.45 -2.37,94.45 ccw(c-2.37,93.25) -3.57,93.25 -3.57,-4.35
Board information:
  text ".Component_Count" at 172.78,-16.75 h1.91
  text "Components" at 155.48,-16.95 h1.91
  text ".Pad_Count" at 173.18,-19.725 h1.91
  text "Pins" at 155.88,-19.925 h1.91
  text ".Via_Count" at 172.98,-22.5 h1.91
  text "Vias" at 155.68,-22.7 h1.91
  text ".Hole_Count" at 172.98,-25.275 h1.91
  text "Holes" at 155.68,-25.475 h1.91
  text ".Net_Count" at 172.88,-28.05 h1.91
  text "Nets" at 155.58,-28.25 h1.91
M3 Mezzanine Board outline:
  lines w0.2: 48.495,82.3 48.495,6.7 ; 48.5,6.7 cw(c46.5,6.7) 46.5,4.7 -1.9,4.7 cw(c-1.9,6.7) -3.9,6.7 -3.9,82.3 cw(c-1.9,82.3) -1.9,84.3 46.5,84.3 cw(c46.5,82.3) 48.5,82.3
Corners:
  lines w0.2: -8.57,-5.55 -3.57,-5.55 -3.57,-10.55 ; -8.57,94.45 -3.57,94.45 -3.57,99.45 ; 213.8,-10.55 213.8,-5.55 218.8,-5.55 ; 213.8,99.45 213.8,94.45 218.8,94.45
  lines w0.254: 75.861,-32.261 75.861,-27.181 ; 80.941,-32.261 80.941,-27.181 ; 86.021,-32.261 86.021,-27.181 ; 70.781,-32.261 91.101,-32.261 91.101,-27.181 70.781,-27.181 70.781,-32.261
Title Block:
  circle w0.305: c5.376,-19.561 r3.81
  lines w0.254: 3.471,-20.823 ccw(c7.916,-20.831) 4.183,-18.417 ; 12.361,-20.831 12.361,-16.386 ; 14.901,-24.006 56.811,-24.006 ; 14.901,-20.831 56.811,-20.831 ; 14.901,-17.656 56.811,-17.656 ; 28.871,-27.181 28.871,-14.481 ; 0.931,-27.181 0.931,-14.481 13.631,-14.481 13.631,-27.181 0.931,-27.181 ; 14.901,-27.181 14.901,-14.481 56.811,-14.481 56.811,-27.181 14.901,-27.181
  lines w0.305: 1.82,-20.933 2.836,-24.006 ; 4.868,-27.054 7.941,-22.38 ; 5.376,-15.751 12.996,-15.116 ; 9.109,-18.799 11.726,-27.181
  text "Number" at 16.171,-17.021 h1.91
  text "EDA-04213-V3" at 30.141,-17.021 h1.91
  text "L. Pajak" at 30.1,-20.1 h1.91
  text "Drawn By" at 16.171,-20.196 h1.91
  text "CERN" at 2.201,-20.45 h2.54
  text "DATE" at 16.171,-23.371 h1.91
  text "16/06/2023" at 30.141,-23.371 h1.91
  text "MOD." at 16.171,-26.546 h1.91
  text "MF 22/04/2025" at 30.141,-26.546 h1.91
  text "Print Date" at 16.171,-29.721 h1.27
  text ".Print_Date" at 31.411,-29.721 h1.27
  text ".Print_Time" at 44.111,-29.721 h1.27
  text ".Print_Scale" at 16.171,-31.626 h1.27
  text "Altium Designer Rev" at 16.171,-33.531 h1.27
  text "'.Application_BuildNumber'" at 35.221,-33.531 h1.27
Notvisible:
  lines w0.025: 184.082,104.921 186.961,107.8 190.009,110.848 193.057,113.896 194.581,115.42 ; 184.082,106.445 185.437,107.8 188.485,110.848 191.533,113.896 194.581,116.944 ; 184.082,107.969 186.961,110.848 190.009,113.896 193.057,116.944 194.581,118.468 ; 184.082,109.493 185.437,110.848 188.485,113.896 191.533,116.944 194.581,119.992 ; 184.082,111.017 186.961,113.896 190.009,116.944 193.057,119.992 194.581,121.516 ; 184.082,112.541 185.437,113.896 188.485,116.944 191.533,119.992 194.581,123.04 ; 184.082,114.065 186.961,116.944 190.009,119.992 193.057,123.04 194.581,124.564 ; 184.082,115.589 185.437,116.944 188.485,119.992 191.533,123.04 194.581,126.088 ; 184.082,117.113 186.961,119.992 190.009,123.04 193.057,126.088 ; 184.082,118.637 185.437,119.992 188.485,123.04 191.533,126.088 ; 184.082,120.161 186.961,123.04 190.009,126.088 ; 184.082,121.685 185.437,123.04 188.485,126.088 ; 184.082,123.209 186.961,126.088 ; 184.082,124.733 185.437,126.088 ; 185.437,104.752 188.485,107.8 191.533,110.848 194.581,113.896 ; 186.961,104.752 190.009,107.8 193.057,110.848 194.581,112.372 ; 188.485,104.752 191.533,107.8 194.581,110.848 ; 190.009,104.752 193.057,107.8 194.581,109.324 ; 191.533,104.752 194.581,107.8 ; 193.057,104.752 194.581,106.276
  lines w0.254: 70.781,-25.911 91.101,-25.911 ; 73.956,-25.911 81.576,-18.291 ; 79.036,-25.911 86.656,-18.291 ; 84.116,-25.911 91.736,-18.291 ; 89.196,-25.911 96.816,-18.291
  lines w0.381: 113.336,107.8 122.181,107.8 141.605,107.8 158.431,107.8 171.565,107.8 184.082,107.8 194.581,107.8 ; 113.336,110.848 122.181,110.848 141.605,110.848 158.431,110.848 171.565,110.848 184.082,110.848 194.581,110.848 ; 113.336,113.896 122.181,113.896 141.605,113.896 158.431,113.896 171.565,113.896 184.082,113.896 194.581,113.896 ; 113.336,116.944 122.181,116.944 141.605,116.944 158.431,116.944 171.565,116.944 184.082,116.944 194.581,116.944 ; 113.336,119.992 122.181,119.992 141.605,119.992 158.431,119.992 171.565,119.992 184.082,119.992 194.581,119.992 ; 113.336,123.04 122.181,123.04 141.605,123.04 158.431,123.04 171.565,123.04 184.082,123.04 194.581,123.04 ; 113.336,126.088 194.581,126.088 ; 122.181,129.136 122.181,104.752 ; 141.605,129.136 141.605,104.752 ; 158.431,129.136 158.431,104.752 ; 171.565,129.136 171.565,104.752 ; 184.082,129.136 184.082,104.752 ; 122.181,104.752 141.605,104.752 ; 122.181,104.752 113.336,104.752 113.336,129.136 194.581,129.136 194.581,104.752 184.082,104.752 ; 141.605,104.752 158.431,104.752 ; 158.431,104.752 171.565,104.752 ; 171.565,104.752 184.082,104.752
  text "(stackup drawing useless as done only to specify 70um copper thickness, done on the specification file)" at 82.105,143.5 h1.91
  text "Layer" at 115.114,126.85 h1.52
  text "Name" at 123.959,126.85 h1.52
  text "Material" at 143.383,126.85 h1.52
  text "Thickness" at 160.209,126.85 h1.52
  text "Constant" at 173.343,126.85 h1.52
  text "Stack" at 185.86,126.85 h1.52
  text "Top Overlay" at 123.959,123.802 h1.52
  text "Top Solder" at 123.959,120.754 h1.52
  text "Solder Resist" at 143.383,120.754 h1.52
  text "0,020mm" at 160.209,120.754 h1.52
  text "3.5" at 173.343,120.754 h1.52
  text "1" at 115.114,117.706 h1.52
  text "Top Layer" at 123.959,117.706 h1.52
  text "0,070mm" at 160.209,117.706 h1.52
  text "Dielectric 2" at 123.959,114.658 h1.52
  text "FR-4" at 143.383,114.658 h1.52
  text "1,550mm" at 160.209,114.658 h1.52
  text "4.3" at 173.343,114.658 h1.52
  text "2" at 115.114,111.61 h1.52
  text "Bottom Layer" at 123.959,111.61 h1.52
  text "0,070mm" at 160.209,111.61 h1.52
  text "Bottom Solder" at 123.959,108.562 h1.52
  text "Solder Resist" at 143.383,108.562 h1.52
  text "0,020mm" at 160.209,108.562 h1.52
  text "3.5" at 173.343,108.562 h1.52
  text "Bottom Overlay" at 123.959,105.514 h1.52
  text "Total board thickness:" at 115.114,102.466 h1.52
  text "1,730mm" at 160.209,102.466 h1.52
Drill Drawing:
  circle w0.254: c0.486,141.72 r0.508
  circle w0.254: c0.486,141.72 r0.847
  circle w0.254: c0.486,115.05 r0.847
  lines w0.254: -0.361,111.24 0.486,110.393 1.333,111.24 0.486,112.087 -0.361,111.24 ; -0.361,118.437 0.063,118.437 0.486,118.013 0.909,118.437 1.333,118.437 0.909,118.86 1.333,119.283 0.909,119.283 0.486,119.707 0.063,119.283 -0.361,119.283 0.063,118.86 -0.361,118.437 ; -0.361,121.823 1.333,121.823 1.333,123.517 -0.361,123.517 -0.361,121.823 ; -0.361,127.327 1.333,127.327 0.486,125.633 -0.361,127.327 ; -0.361,129.867 0.063,129.867 0.063,129.443 0.909,129.443 0.909,129.867 1.333,129.867 1.333,130.713 0.909,130.713 0.909,131.137 0.063,131.137 0.063,130.713 -0.361,130.713 -0.361,129.867 ; -0.361,133.253 1.333,133.253 1.333,134.947 -0.361,134.947 -0.361,133.253 ; -0.361,138.757 1.333,138.757 0.486,137.063 -0.361,138.757 ; -0.361,144.683 0.486,145.107 1.333,144.683 0.909,145.53 1.333,146.377 0.486,145.953 -0.361,146.377 0.063,145.53 -0.361,144.683 ; -0.022,126.988 0.994,126.988 0.486,125.972 -0.022,126.988 ; -0.022,133.592 0.994,133.592 0.994,134.608 -0.022,134.608 -0.022,133.592
  lines w0.381: -1.88,109.25 69.814,109.25 ; -1.88,147.35 69.814,147.35 ; 10.886,105.44 10.886,151.16 ; 22.06,105.44 22.06,151.16 ; 46.113,105.44 46.113,151.16 ; 56.195,105.44 56.195,151.16 ; -1.88,105.44 69.814,105.44 69.814,151.16 -1.88,151.16 -1.88,105.44
  text "Symbol" at 0.406,148.493 h1.83
  text "Count" at 12.029,148.493 h1.83
  text "Hole Size" at 23.203,148.493 h1.83
  text "Plated" at 47.256,148.493 h1.83
  text "Via/Pad" at 57.338,148.493 h1.83
  text "10" at 12.029,144.683 h1.52
  text "0.40mm (15.75mil)" at 23.203,144.683 h1.52
  text "PTH" at 47.256,144.683 h1.52
  text "Via" at 57.338,144.683 h1.52
  text "6" at 12.029,140.873 h1.52
  text "0.90mm (35.43mil)" at 23.203,140.873 h1.52
  text "PTH" at 47.256,140.873 h1.52
  text "Pad" at 57.338,140.873 h1.52
  text "4" at 12.029,137.063 h1.52
  text "1.00mm (39.37mil)" at 23.203,137.063 h1.52
  text "PTH" at 47.256,137.063 h1.52
  text "Pad" at 57.338,137.063 h1.52
  text "8" at 12.029,133.253 h1.52
  text "1.30mm (51.18mil)" at 23.203,133.253 h1.52
  text "PTH" at 47.256,133.253 h1.52
  text "Pad" at 57.338,133.253 h1.52
  text "7" at 12.029,129.443 h1.52
  text "1.40mm (55.12mil)" at 23.203,129.443 h1.52
  text "PTH" at 47.256,129.443 h1.52
  text "Pad" at 57.338,129.443 h1.52
  text "1" at 12.029,125.633 h1.52
  text "1.60mm (62.99mil)" at 23.203,125.633 h1.52
  text "PTH" at 47.256,125.633 h1.52
  text "Pad" at 57.338,125.633 h1.52
  text "8" at 12.029,121.823 h1.52
  text "2.00mm (78.74mil)" at 23.203,121.823 h1.52
  text "PTH" at 47.256,121.823 h1.52
  text "Pad" at 57.338,121.823 h1.52
  text "4" at 12.029,118.013 h1.52
  text "3.20mm (125.98mil)" at 23.203,118.013 h1.52
  text "PTH" at 47.256,118.013 h1.52
  text "Pad" at 57.338,118.013 h1.52
  text "10" at 12.029,114.203 h1.52
  text "1.10mm (43.31mil)" at 23.203,114.203 h1.52
  text "NPTH" at 47.256,114.203 h1.52
  text "Pad" at 57.338,114.203 h1.52
  text "2" at 12.029,110.393 h1.52
  text "6.00mm (236.22mil)" at 23.203,110.393 h1.52
  text "NPTH" at 47.256,110.393 h1.52
  text "Pad" at 57.338,110.393 h1.52
  text "60 Total" at 12.029,106.583 h1.52
  text "General tolerances +/-0.05mm unless otherwise stated" at -2.006,101.955 h1.5

## Dimensions
213.8,94.45 to 213.8,-5.55 on Board information
-3.57,94.45 to 213.8,94.45 on Board information

## Text inside footprints (layer, text, board x,y; h text height)
FL1: Top Overlay "P'" at 30.4,43.61 h1.2 r90; Top Overlay "N'" at 30.4,35.99 h1.2 r90; Top Overlay "PE" at 30.4,25.19 h1.2 r90; Top Overlay "N" at 30.4,18.21 h1.2 r90; Top Overlay "P" at 30.4,10.59 h1.2 r90
IC2: Top Overlay "AC(N)" at 19.933,54.987 h1.2 r90; Top Overlay "-Vo" at 19.91,75.925 h1.2 r90; Top Overlay "+Vo" at 27.51,75.925 h1.2 r90; Top Overlay "AC(L)" at 35.133,54.987 h1.2 r90; Notvisible "3" at 19.9,82.9 h1.2 r90; Notvisible "4" at 27.4,82.9 h1.2 r90; Notvisible "2" at 35.133,50.8 h1.2 r90; Notvisible "1" at 19.933,50.9 h1.2 r90; Mechanical 14 "+Vo" at 27.51,75.925 h1.2 r90; Mechanical 14 "-Vo" at 19.91,75.925 h1.2 r90; Mechanical 14 "AC(N)" at 19.933,54.987 h1.2 r90; Mechanical 14 "AC(L)" at 35.133,54.987 h1.2 r90
J2: Top Overlay "L" at 8.925,42.303 h1.5 r90; Top Overlay "N" at 8.95,75 h1.5 r90; Notvisible "Must be 2mm" at 5.95,54.025 h1 r90; Notvisible "3D Fuse (5X20) Stand-off Heigh" at 3.975,47.575 h1 r90; Mechanical 14 "L" at 8.925,42.303 h1.5 r90; Mechanical 14 "N" at 8.95,75 h1.5 r90
SW1: Mechanical 14 "Fron Panel" at -6.781,15.973 h2 r90